# EAGLE board Encoder iC-PX v1b Panel (EAGLE 9.4.2)
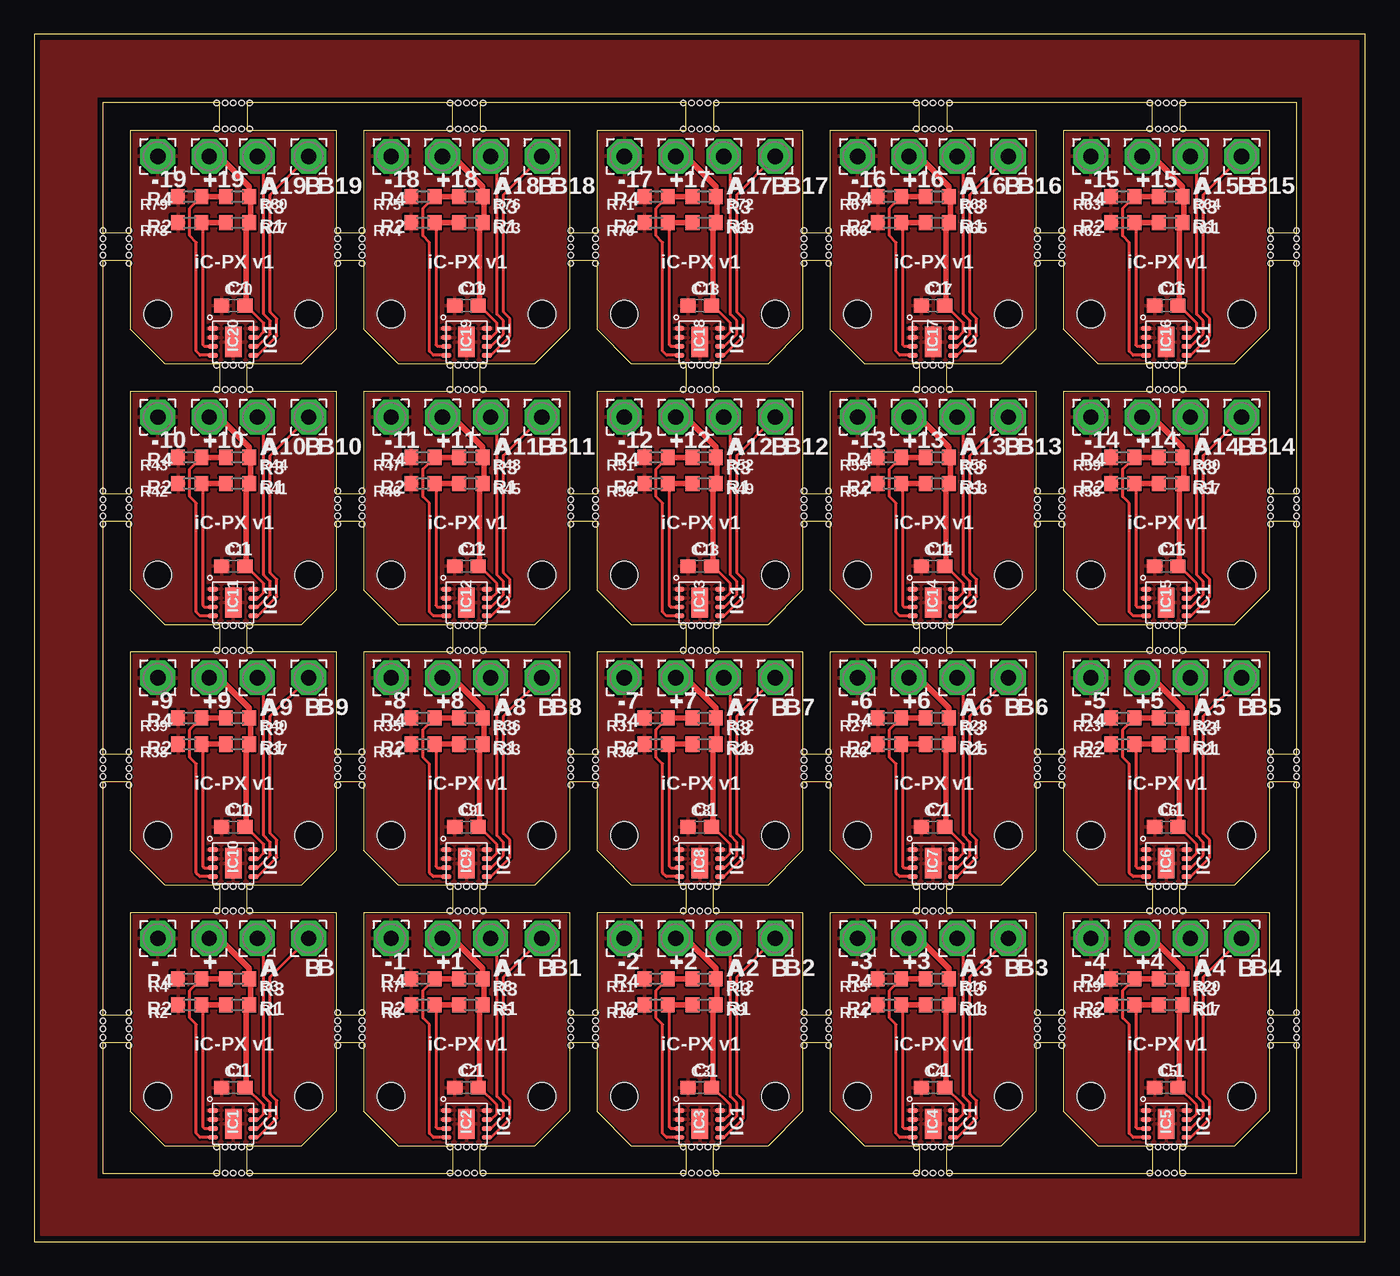
[diagram p0: board, top side]
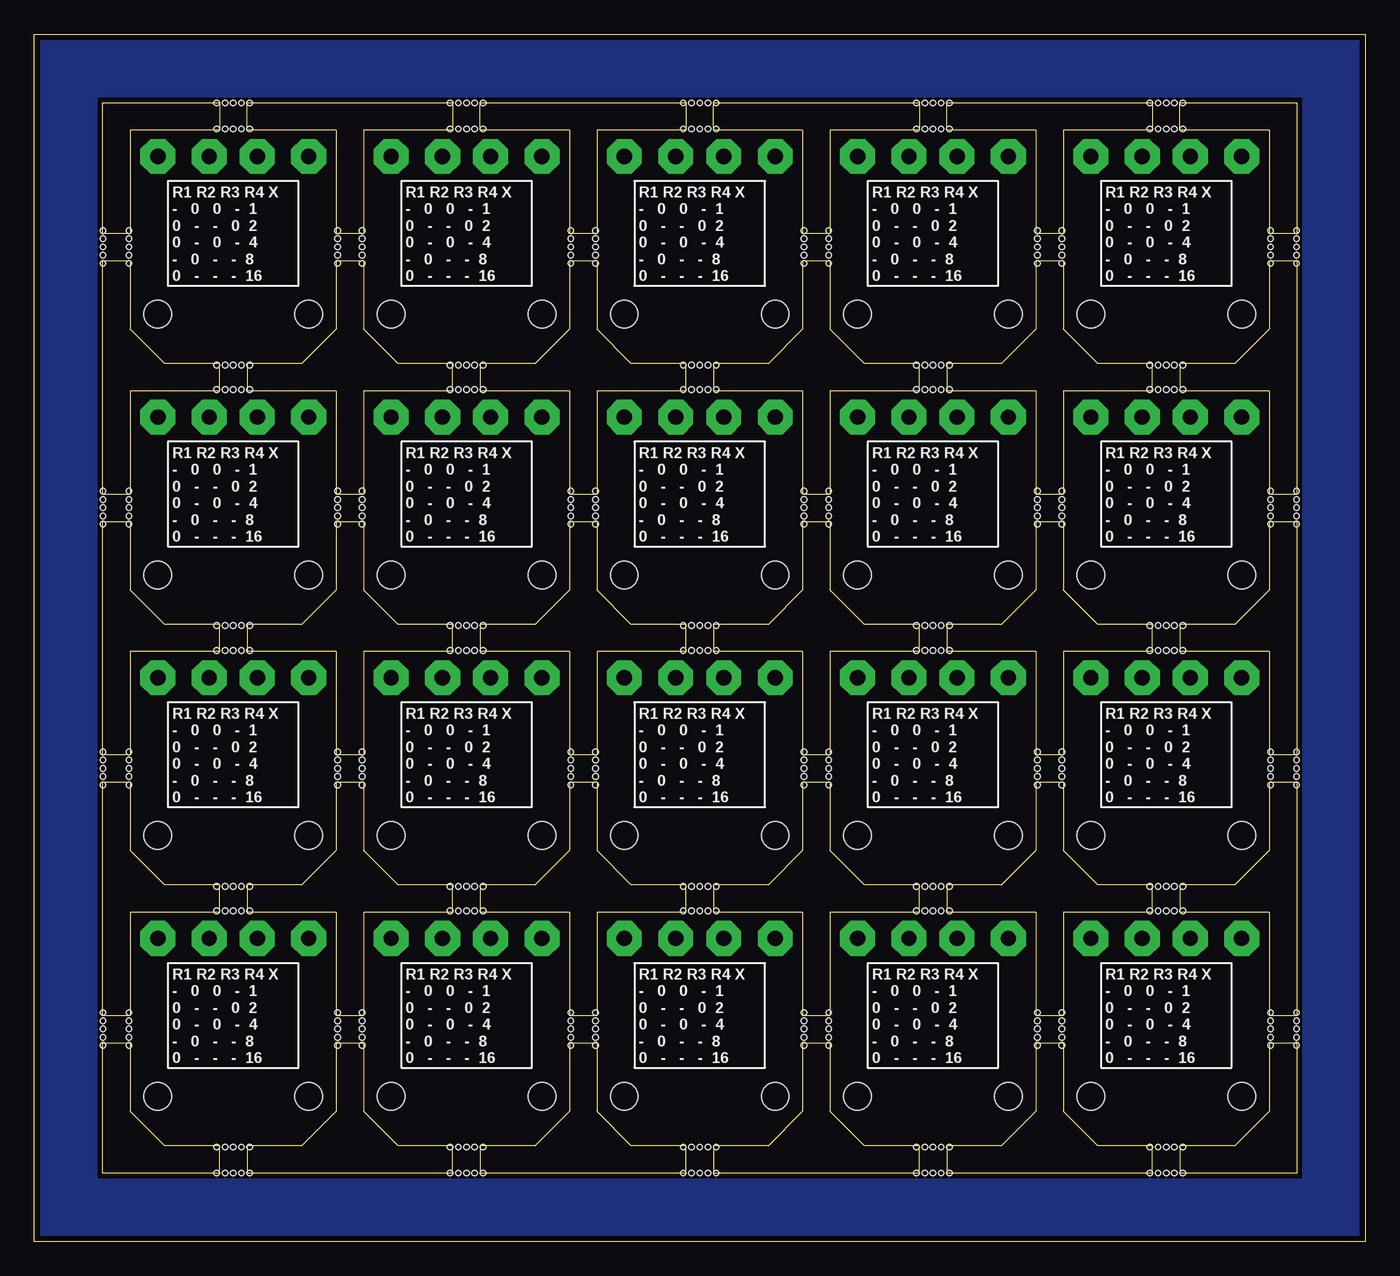
[diagram p1: board, bottom side, seen from below]

Size 97 x 88 mm. Coordinates in mm from the lower left corner, seen from the top.
Outline: 0,0 97,0 97,88 0,88 0,0
Copper layers (1*16): Top 0.035mm / dielectric 1.5mm / Bottom 0.035mm
Design rules "PCB-POOL Standard *": minimum track width 0.15mm, minimum drill 0.3mm, track to track 0.15mm, track to pad 0.15mm, pad to pad 0.15mm, via to via 0.15mm, smd to smd 0.15mm, copper to edge 0.1mm, drill to drill 0.2mm, minimum pad ring 0.2mm, minimum via ring 0.15mm, stop-mask expansion 0.075mm, vias tented up to drill 0mil, thermal gap 0.2mm
Holes 2 mm at 9,10.6 20,10.6 9,29.6 20,29.6 9,48.6 20,48.6 9,67.6 20,67.6 26,10.6 37,10.6 26,29.6 37,29.6 26,48.6 37,48.6 26,67.6 37,67.6 43,10.6 54,10.6 43,29.6 54,29.6 43,48.6 54,48.6 43,67.6 54,67.6 60,10.6 71,10.6 60,29.6 71,29.6 60,48.6 71,48.6 60,67.6 71,67.6 77,10.6 88,10.6 77,29.6 88,29.6 77,48.6 88,48.6 77,67.6 88,67.6
Holes 0.4 mm at 14.5,24.1 15.1,24.1 15.7,24.1 13.9,24.1 13.3,24.1 22.1,15.5 22.1,16.1 22.1,16.7 22.1,14.9 22.1,14.3 6.9,15.5 6.9,16.1 6.9,16.7 6.9,14.9 6.9,14.3 14.5,6.9 15.1,6.9 15.7,6.9 13.9,6.9 13.3,6.9 14.5,43.1 15.1,43.1 15.7,43.1 13.9,43.1 13.3,43.1 22.1,34.5 22.1,35.1 22.1,35.7 22.1,33.9 22.1,33.3 6.9,34.5 6.9,35.1 6.9,35.7 6.9,33.9 6.9,33.3 14.5,25.9 15.1,25.9 15.7,25.9 13.9,25.9 13.3,25.9 14.5,62.1 15.1,62.1 15.7,62.1 13.9,62.1 13.3,62.1 22.1,53.5 22.1,54.1 22.1,54.7 22.1,52.9 22.1,52.3 6.9,53.5 6.9,54.1 6.9,54.7 6.9,52.9 6.9,52.3 14.5,44.9 15.1,44.9 15.7,44.9 13.9,44.9 13.3,44.9 14.5,81.1 15.1,81.1 15.7,81.1 13.9,81.1 13.3,81.1 22.1,72.5 22.1,73.1 22.1,73.7 22.1,71.9 22.1,71.3 6.9,72.5 6.9,73.1 6.9,73.7 6.9,71.9 6.9,71.3 14.5,63.9 15.1,63.9 15.7,63.9 13.9,63.9 13.3,63.9 31.5,24.1 32.1,24.1 32.7,24.1 30.9,24.1 30.3,24.1 39.1,15.5 39.1,16.1 39.1,16.7 39.1,14.9 39.1,14.3 23.9,15.5 23.9,16.1 23.9,16.7 23.9,14.9 23.9,14.3 31.5,6.9 32.1,6.9 32.7,6.9 30.9,6.9 30.3,6.9 31.5,43.1 32.1,43.1 32.7,43.1 30.9,43.1 30.3,43.1 39.1,34.5 39.1,35.1 39.1,35.7 39.1,33.9 39.1,33.3 23.9,34.5 23.9,35.1 23.9,35.7 23.9,33.9 23.9,33.3 31.5,25.9 32.1,25.9 32.7,25.9 30.9,25.9 30.3,25.9 31.5,62.1 32.1,62.1 32.7,62.1 30.9,62.1 30.3,62.1 39.1,53.5 39.1,54.1 39.1,54.7 39.1,52.9 39.1,52.3 23.9,53.5 23.9,54.1 23.9,54.7 23.9,52.9 23.9,52.3 31.5,44.9 32.1,44.9 32.7,44.9 30.9,44.9 30.3,44.9 31.5,81.1 32.1,81.1 32.7,81.1 30.9,81.1 30.3,81.1 39.1,72.5 39.1,73.1 39.1,73.7 39.1,71.9 39.1,71.3 23.9,72.5 23.9,73.1 23.9,73.7 23.9,71.9 23.9,71.3 31.5,63.9 32.1,63.9 32.7,63.9 30.9,63.9 30.3,63.9 48.5,24.1 49.1,24.1 49.7,24.1 47.9,24.1 47.3,24.1 56.1,15.5 56.1,16.1 56.1,16.7 56.1,14.9 56.1,14.3 40.9,15.5 40.9,16.1 40.9,16.7 40.9,14.9 40.9,14.3 48.5,6.9 49.1,6.9 49.7,6.9 47.9,6.9 47.3,6.9 48.5,43.1 49.1,43.1 49.7,43.1 47.9,43.1 47.3,43.1 56.1,34.5 56.1,35.1 56.1,35.7 56.1,33.9 56.1,33.3 40.9,34.5 40.9,35.1 40.9,35.7 40.9,33.9 40.9,33.3 48.5,25.9 49.1,25.9 49.7,25.9 47.9,25.9 47.3,25.9 48.5,62.1 49.1,62.1 49.7,62.1 47.9,62.1 47.3,62.1 56.1,53.5 56.1,54.1 56.1,54.7 56.1,52.9 56.1,52.3 40.9,53.5 40.9,54.1 40.9,54.7 40.9,52.9 40.9,52.3 48.5,44.9 49.1,44.9 49.7,44.9 47.9,44.9 47.3,44.9 48.5,81.1 49.1,81.1 49.7,81.1 47.9,81.1 47.3,81.1 56.1,72.5 56.1,73.1 56.1,73.7 56.1,71.9 56.1,71.3 40.9,72.5 40.9,73.1 40.9,73.7 40.9,71.9 40.9,71.3 48.5,63.9 49.1,63.9 49.7,63.9 47.9,63.9 47.3,63.9 65.5,24.1 66.1,24.1 66.7,24.1 64.9,24.1 64.3,24.1 73.1,15.5 73.1,16.1 73.1,16.7 73.1,14.9 73.1,14.3 57.9,15.5 57.9,16.1 57.9,16.7 57.9,14.9 57.9,14.3 65.5,6.9 66.1,6.9 66.7,6.9 64.9,6.9 64.3,6.9 65.5,43.1 66.1,43.1 66.7,43.1 64.9,43.1 64.3,43.1 73.1,34.5 73.1,35.1 73.1,35.7 73.1,33.9 73.1,33.3 57.9,34.5 57.9,35.1 57.9,35.7 57.9,33.9 57.9,33.3 65.5,25.9 66.1,25.9 66.7,25.9 64.9,25.9 64.3,25.9 65.5,62.1 66.1,62.1 66.7,62.1 64.9,62.1 64.3,62.1 73.1,53.5 73.1,54.1 73.1,54.7 73.1,52.9 73.1,52.3 57.9,53.5 57.9,54.1 57.9,54.7 57.9,52.9 57.9,52.3 65.5,44.9 66.1,44.9 66.7,44.9 64.9,44.9 64.3,44.9 65.5,81.1 66.1,81.1 66.7,81.1 64.9,81.1 64.3,81.1 73.1,72.5 73.1,73.1 73.1,73.7 73.1,71.9 73.1,71.3 57.9,72.5 57.9,73.1 57.9,73.7 57.9,71.9 57.9,71.3 65.5,63.9 66.1,63.9 66.7,63.9 64.9,63.9 64.3,63.9 82.5,24.1 83.1,24.1 83.7,24.1 81.9,24.1 81.3,24.1 90.1,15.5 90.1,16.1 90.1,16.7 90.1,14.9 90.1,14.3 74.9,15.5 74.9,16.1 74.9,16.7 74.9,14.9 74.9,14.3 82.5,6.9 83.1,6.9 83.7,6.9 81.9,6.9 81.3,6.9 82.5,43.1 83.1,43.1 83.7,43.1 81.9,43.1 81.3,43.1 90.1,34.5 90.1,35.1 90.1,35.7 90.1,33.9 90.1,33.3 74.9,34.5 74.9,35.1 74.9,35.7 74.9,33.9 74.9,33.3 82.5,25.9 83.1,25.9 83.7,25.9 81.9,25.9 81.3,25.9 82.5,62.1 83.1,62.1 83.7,62.1 81.9,62.1 81.3,62.1 90.1,53.5 90.1,54.1 90.1,54.7 90.1,52.9 90.1,52.3 74.9,53.5 74.9,54.1 74.9,54.7 74.9,52.9 74.9,52.3 82.5,44.9 83.1,44.9 83.7,44.9 81.9,44.9 81.3,44.9 82.5,81.1 83.1,81.1 83.7,81.1 81.9,81.1 81.3,81.1 90.1,72.5 90.1,73.1 90.1,73.7 90.1,71.9 90.1,71.3 74.9,72.5 74.9,73.1 74.9,73.7 74.9,71.9 74.9,71.3 82.5,63.9 83.1,63.9 83.7,63.9 81.9,63.9 81.3,63.9 5,15.5 5,16.1 5,16.7 5,14.9 5,14.3 5,34.5 5,35.1 5,35.7 5,33.9 5,33.3 5,53.5 5,54.1 5,54.7 5,52.9 5,52.3 5,72.5 5,73.1 5,73.7 5,71.9 5,71.3 14.5,5 15.1,5 15.7,5 13.9,5 13.3,5 31.5,5 32.1,5 32.7,5 30.9,5 30.3,5 48.5,5 49.1,5 49.7,5 47.9,5 47.3,5 65.5,5 66.1,5 66.7,5 64.9,5 64.3,5 82.5,5 83.1,5 83.7,5 81.9,5 81.3,5 92,15.5 92,16.1 92,16.7 92,14.9 92,14.3 92,34.5 92,35.1 92,35.7 92,33.9 92,33.3 92,53.5 92,54.1 92,54.7 92,52.9 92,52.3 92,72.5 92,73.1 92,73.7 92,71.9 92,71.3 14.5,83 15.1,83 15.7,83 13.9,83 13.3,83 31.5,83 32.1,83 32.7,83 30.9,83 30.3,83 48.5,83 49.1,83 49.7,83 47.9,83 47.3,83 65.5,83 66.1,83 66.7,83 64.9,83 64.3,83 82.5,83 83.1,83 83.7,83 81.9,83 81.3,83
tKeepout: area 7,8.6 to 11,12.6; area 18,8.6 to 22,12.6; area 7,27.6 to 11,31.6; area 18,27.6 to 22,31.6; area 7,46.6 to 11,50.6; area 18,46.6 to 22,50.6; area 7,65.6 to 11,69.6; area 18,65.6 to 22,69.6; area 24,8.6 to 28,12.6; area 35,8.6 to 39,12.6; area 24,27.6 to 28,31.6; area 35,27.6 to 39,31.6; 28 more areas
Milling: 320 lines

## Footprints (pad centres in the part's own frame; a part is rotated, then mirrored left to right if it is on the bottom)
2,54/1,1 = drill 1.118 pad 2.54 octagon: 1 0,0
C0603 = smd 1.1 x 1: 1 -0.85,0; 2 0.85,0
ODFN8-3X3 = smd 0.7 x 0.35: 1 -1.475,0.975; 2 -1.475,0.325; 3 -1.475,-0.325; 4 -1.475,-0.975; 5 1.475,-0.975; 6 1.475,-0.325; 7 1.475,0.325; 8 1.475,0.975 | smd 1.2 x 2.2: BP 0,0
R0603 = smd 1 x 1.1: 1 -0.85,0; 2 0.85,0

## Placement (x,y rotation side)
+  WIREPAD2,54/1,1  [2,54/1,1]  12.75,22.1 0 top
+1  WIREPAD2,54/1,1  [2,54/1,1]  29.75,22.1 0 top
+2  WIREPAD2,54/1,1  [2,54/1,1]  46.75,22.1 0 top
+3  WIREPAD2,54/1,1  [2,54/1,1]  63.75,22.1 0 top
+4  WIREPAD2,54/1,1  [2,54/1,1]  80.75,22.1 0 top
+5  WIREPAD2,54/1,1  [2,54/1,1]  80.75,41.1 0 top
+6  WIREPAD2,54/1,1  [2,54/1,1]  63.75,41.1 0 top
+7  WIREPAD2,54/1,1  [2,54/1,1]  46.75,41.1 0 top
+8  WIREPAD2,54/1,1  [2,54/1,1]  29.75,41.1 0 top
+9  WIREPAD2,54/1,1  [2,54/1,1]  12.75,41.1 0 top
+10  WIREPAD2,54/1,1  [2,54/1,1]  12.75,60.1 0 top
+11  WIREPAD2,54/1,1  [2,54/1,1]  29.75,60.1 0 top
+12  WIREPAD2,54/1,1  [2,54/1,1]  46.75,60.1 0 top
+13  WIREPAD2,54/1,1  [2,54/1,1]  63.75,60.1 0 top
+14  WIREPAD2,54/1,1  [2,54/1,1]  80.75,60.1 0 top
+15  WIREPAD2,54/1,1  [2,54/1,1]  80.75,79.1 0 top
+16  WIREPAD2,54/1,1  [2,54/1,1]  63.75,79.1 0 top
+17  WIREPAD2,54/1,1  [2,54/1,1]  46.75,79.1 0 top
+18  WIREPAD2,54/1,1  [2,54/1,1]  29.75,79.1 0 top
+19  WIREPAD2,54/1,1  [2,54/1,1]  12.75,79.1 0 top
-  WIREPAD2,54/1,1  [2,54/1,1]  9,22.1 0 top
-1  WIREPAD2,54/1,1  [2,54/1,1]  26,22.1 0 top
-2  WIREPAD2,54/1,1  [2,54/1,1]  43,22.1 0 top
-3  WIREPAD2,54/1,1  [2,54/1,1]  60,22.1 0 top
-4  WIREPAD2,54/1,1  [2,54/1,1]  77,22.1 0 top
-5  WIREPAD2,54/1,1  [2,54/1,1]  77,41.1 0 top
-6  WIREPAD2,54/1,1  [2,54/1,1]  60,41.1 0 top
-7  WIREPAD2,54/1,1  [2,54/1,1]  43,41.1 0 top
-8  WIREPAD2,54/1,1  [2,54/1,1]  26,41.1 0 top
-9  WIREPAD2,54/1,1  [2,54/1,1]  9,41.1 0 top
-10  WIREPAD2,54/1,1  [2,54/1,1]  9,60.1 0 top
-11  WIREPAD2,54/1,1  [2,54/1,1]  26,60.1 0 top
-12  WIREPAD2,54/1,1  [2,54/1,1]  43,60.1 0 top
-13  WIREPAD2,54/1,1  [2,54/1,1]  60,60.1 0 top
-14  WIREPAD2,54/1,1  [2,54/1,1]  77,60.1 0 top
-15  WIREPAD2,54/1,1  [2,54/1,1]  77,79.1 0 top
-16  WIREPAD2,54/1,1  [2,54/1,1]  60,79.1 0 top
-17  WIREPAD2,54/1,1  [2,54/1,1]  43,79.1 0 top
-18  WIREPAD2,54/1,1  [2,54/1,1]  26,79.1 0 top
-19  WIREPAD2,54/1,1  [2,54/1,1]  9,79.1 0 top
A  WIREPAD2,54/1,1  [2,54/1,1]  16.25,22.1 0 top
A1  WIREPAD2,54/1,1  [2,54/1,1]  33.25,22.1 0 top
A2  WIREPAD2,54/1,1  [2,54/1,1]  50.25,22.1 0 top
A3  WIREPAD2,54/1,1  [2,54/1,1]  67.25,22.1 0 top
A4  WIREPAD2,54/1,1  [2,54/1,1]  84.25,22.1 0 top
A5  WIREPAD2,54/1,1  [2,54/1,1]  84.25,41.1 0 top
A6  WIREPAD2,54/1,1  [2,54/1,1]  67.25,41.1 0 top
A7  WIREPAD2,54/1,1  [2,54/1,1]  50.25,41.1 0 top
A8  WIREPAD2,54/1,1  [2,54/1,1]  33.25,41.1 0 top
A9  WIREPAD2,54/1,1  [2,54/1,1]  16.25,41.1 0 top
A10  WIREPAD2,54/1,1  [2,54/1,1]  16.25,60.1 0 top
A11  WIREPAD2,54/1,1  [2,54/1,1]  33.25,60.1 0 top
A12  WIREPAD2,54/1,1  [2,54/1,1]  50.25,60.1 0 top
A13  WIREPAD2,54/1,1  [2,54/1,1]  67.25,60.1 0 top
A14  WIREPAD2,54/1,1  [2,54/1,1]  84.25,60.1 0 top
A15  WIREPAD2,54/1,1  [2,54/1,1]  84.25,79.1 0 top
A16  WIREPAD2,54/1,1  [2,54/1,1]  67.25,79.1 0 top
A17  WIREPAD2,54/1,1  [2,54/1,1]  50.25,79.1 0 top
A18  WIREPAD2,54/1,1  [2,54/1,1]  33.25,79.1 0 top
A19  WIREPAD2,54/1,1  [2,54/1,1]  16.25,79.1 0 top
B  WIREPAD2,54/1,1  [2,54/1,1]  20,22.1 0 top
B1  WIREPAD2,54/1,1  [2,54/1,1]  37,22.1 0 top
B2  WIREPAD2,54/1,1  [2,54/1,1]  54,22.1 0 top
B3  WIREPAD2,54/1,1  [2,54/1,1]  71,22.1 0 top
B4  WIREPAD2,54/1,1  [2,54/1,1]  88,22.1 0 top
B5  WIREPAD2,54/1,1  [2,54/1,1]  88,41.1 0 top
B6  WIREPAD2,54/1,1  [2,54/1,1]  71,41.1 0 top
B7  WIREPAD2,54/1,1  [2,54/1,1]  54,41.1 0 top
B8  WIREPAD2,54/1,1  [2,54/1,1]  37,41.1 0 top
B9  WIREPAD2,54/1,1  [2,54/1,1]  20,41.1 0 top
B10  WIREPAD2,54/1,1  [2,54/1,1]  20,60.1 0 top
B11  WIREPAD2,54/1,1  [2,54/1,1]  37,60.1 0 top
B12  WIREPAD2,54/1,1  [2,54/1,1]  54,60.1 0 top
B13  WIREPAD2,54/1,1  [2,54/1,1]  71,60.1 0 top
B14  WIREPAD2,54/1,1  [2,54/1,1]  88,60.1 0 top
B15  WIREPAD2,54/1,1  [2,54/1,1]  88,79.1 0 top
B16  WIREPAD2,54/1,1  [2,54/1,1]  71,79.1 0 top
B17  WIREPAD2,54/1,1  [2,54/1,1]  54,79.1 0 top
B18  WIREPAD2,54/1,1  [2,54/1,1]  37,79.1 0 top
B19  WIREPAD2,54/1,1  [2,54/1,1]  20,79.1 0 top
C1  100n  [C0603]  14.5,11.23 180 top
C2  100n  [C0603]  31.5,11.23 180 top
C3  100n  [C0603]  48.5,11.23 180 top
C4  100n  [C0603]  65.5,11.23 180 top
C5  100n  [C0603]  82.5,11.23 180 top
C6  100n  [C0603]  82.5,30.23 180 top
C7  100n  [C0603]  65.5,30.23 180 top
C8  100n  [C0603]  48.5,30.23 180 top
C9  100n  [C0603]  31.5,30.23 180 top
C10  100n  [C0603]  14.5,30.23 180 top
C11  100n  [C0603]  14.5,49.23 180 top
C12  100n  [C0603]  31.5,49.23 180 top
C13  100n  [C0603]  48.5,49.23 180 top
C14  100n  [C0603]  65.5,49.23 180 top
C15  100n  [C0603]  82.5,49.23 180 top
C16  100n  [C0603]  82.5,68.23 180 top
C17  100n  [C0603]  65.5,68.23 180 top
C18  100n  [C0603]  48.5,68.23 180 top
C19  100n  [C0603]  31.5,68.23 180 top
C20  100n  [C0603]  14.5,68.23 180 top
IC1  iC-PX2604  [ODFN8-3X3]  14.5,8.58 0 top
IC2  iC-PX2604  [ODFN8-3X3]  31.5,8.58 0 top
IC3  iC-PX2604  [ODFN8-3X3]  48.5,8.58 0 top
IC4  iC-PX2604  [ODFN8-3X3]  65.5,8.58 0 top
IC5  iC-PX2604  [ODFN8-3X3]  82.5,8.58 0 top
IC6  iC-PX2604  [ODFN8-3X3]  82.5,27.58 0 top
IC7  iC-PX2604  [ODFN8-3X3]  65.5,27.58 0 top
IC8  iC-PX2604  [ODFN8-3X3]  48.5,27.58 0 top
IC9  iC-PX2604  [ODFN8-3X3]  31.5,27.58 0 top
IC10  iC-PX2604  [ODFN8-3X3]  14.5,27.58 0 top
IC11  iC-PX2604  [ODFN8-3X3]  14.5,46.58 0 top
IC12  iC-PX2604  [ODFN8-3X3]  31.5,46.58 0 top
IC13  iC-PX2604  [ODFN8-3X3]  48.5,46.58 0 top
IC14  iC-PX2604  [ODFN8-3X3]  65.5,46.58 0 top
IC15  iC-PX2604  [ODFN8-3X3]  82.5,46.58 0 top
IC16  iC-PX2604  [ODFN8-3X3]  82.5,65.58 0 top
IC17  iC-PX2604  [ODFN8-3X3]  65.5,65.58 0 top
IC18  iC-PX2604  [ODFN8-3X3]  48.5,65.58 0 top
IC19  iC-PX2604  [ODFN8-3X3]  31.5,65.58 0 top
IC20  iC-PX2604  [ODFN8-3X3]  14.5,65.58 0 top
R1  0R  [R0603]  14.82,17.26 0 top
R2  N/A  [R0603]  11.32,17.26 0 top
R3  N/A  [R0603]  14.82,19.16 0 top
R4  N/A  [R0603]  11.32,19.16 0 top
R5  0R  [R0603]  31.82,17.26 0 top
R6  N/A  [R0603]  28.32,17.26 0 top
R7  N/A  [R0603]  28.32,19.16 0 top
R8  N/A  [R0603]  31.82,19.16 0 top
R9  0R  [R0603]  48.82,17.26 0 top
R10  N/A  [R0603]  45.33,17.26 0 top
R11  N/A  [R0603]  45.33,19.16 0 top
R12  N/A  [R0603]  48.82,19.16 0 top
R13  0R  [R0603]  65.82,17.26 0 top
R14  N/A  [R0603]  62.33,17.26 0 top
R15  N/A  [R0603]  62.33,19.16 0 top
R16  N/A  [R0603]  65.82,19.16 0 top
R17  0R  [R0603]  82.82,17.26 0 top
R18  N/A  [R0603]  79.33,17.26 0 top
R19  N/A  [R0603]  79.33,19.16 0 top
R20  N/A  [R0603]  82.82,19.16 0 top
R21  0R  [R0603]  82.82,36.26 0 top
R22  N/A  [R0603]  79.33,36.26 0 top
R23  N/A  [R0603]  79.33,38.16 0 top
R24  N/A  [R0603]  82.82,38.16 0 top
R25  0R  [R0603]  65.82,36.26 0 top
R26  N/A  [R0603]  62.33,36.26 0 top
R27  N/A  [R0603]  62.33,38.16 0 top
R28  N/A  [R0603]  65.82,38.16 0 top
R29  0R  [R0603]  48.82,36.26 0 top
R30  N/A  [R0603]  45.33,36.26 0 top
R31  N/A  [R0603]  45.33,38.16 0 top
R32  N/A  [R0603]  48.82,38.16 0 top
R33  0R  [R0603]  31.82,36.26 0 top
R34  N/A  [R0603]  28.32,36.26 0 top
R35  N/A  [R0603]  28.32,38.16 0 top
R36  N/A  [R0603]  31.82,38.16 0 top
R37  0R  [R0603]  14.82,36.26 0 top
R38  N/A  [R0603]  11.32,36.26 0 top
R39  N/A  [R0603]  11.32,38.16 0 top
R40  N/A  [R0603]  14.82,38.16 0 top
R41  0R  [R0603]  14.82,55.26 0 top
R42  N/A  [R0603]  11.32,55.26 0 top
R43  N/A  [R0603]  11.32,57.16 0 top
R44  N/A  [R0603]  14.82,57.16 0 top
R45  0R  [R0603]  31.82,55.26 0 top
R46  N/A  [R0603]  28.32,55.26 0 top
R47  N/A  [R0603]  28.32,57.16 0 top
R48  N/A  [R0603]  31.82,57.16 0 top
R49  0R  [R0603]  48.82,55.26 0 top
R50  N/A  [R0603]  45.33,55.26 0 top
R51  N/A  [R0603]  45.33,57.16 0 top
R52  N/A  [R0603]  48.82,57.16 0 top
R53  0R  [R0603]  65.82,55.26 0 top
R54  N/A  [R0603]  62.33,55.26 0 top
R55  N/A  [R0603]  62.33,57.16 0 top
R56  N/A  [R0603]  65.82,57.16 0 top
R57  0R  [R0603]  82.82,55.26 0 top
R58  N/A  [R0603]  79.33,55.26 0 top
R59  N/A  [R0603]  79.33,57.16 0 top
R60  N/A  [R0603]  82.82,57.16 0 top
R61  0R  [R0603]  82.82,74.26 0 top
R62  N/A  [R0603]  79.33,74.26 0 top
R63  N/A  [R0603]  79.33,76.17 0 top
R64  N/A  [R0603]  82.82,76.17 0 top
R65  0R  [R0603]  65.82,74.26 0 top
R66  N/A  [R0603]  62.33,74.26 0 top
R67  N/A  [R0603]  62.33,76.17 0 top
R68  N/A  [R0603]  65.82,76.17 0 top
R69  0R  [R0603]  48.82,74.26 0 top
R70  N/A  [R0603]  45.33,74.26 0 top
R71  N/A  [R0603]  45.33,76.17 0 top
R72  N/A  [R0603]  48.82,76.17 0 top
R73  0R  [R0603]  31.82,74.26 0 top
R74  N/A  [R0603]  28.32,74.26 0 top
R75  N/A  [R0603]  28.32,76.17 0 top
R76  N/A  [R0603]  31.82,76.17 0 top
R77  0R  [R0603]  14.82,74.26 0 top
R78  N/A  [R0603]  11.32,74.26 0 top
R79  N/A  [R0603]  11.32,76.17 0 top
R80  N/A  [R0603]  14.82,76.17 0 top

## Library data of the parts
+ +1-+19 - -1--19 A A1-A19 B B1-B19 = wirepad
C1-C20 = rcl; SPICEPREFIX: C
IC1-IC20 = TIGERs
R1-R80 = rcl; SPICEPREFIX: R

## Nets
+5V: +.1 C1.1 IC1.7 R1.2 R3.2
+5V1: +1.1 C2.1 IC2.7 R5.2 R8.2
+5V2: +2.1 C3.1 IC3.7 R9.2 R12.2
+5V3: +3.1 C4.1 IC4.7 R13.2 R16.2
+5V4: +4.1 C5.1 IC5.7 R17.2 R20.2
+5V5: +5.1 C6.1 IC6.7 R21.2 R24.2
+5V6: +6.1 C7.1 IC7.7 R25.2 R28.2
+5V7: +7.1 C8.1 IC8.7 R29.2 R32.2
+5V8: +8.1 C9.1 IC9.7 R33.2 R36.2
+5V9: +9.1 C10.1 IC10.7 R37.2 R40.2
+5V10: +10.1 C11.1 IC11.7 R41.2 R44.2
+5V11: +11.1 C12.1 IC12.7 R45.2 R48.2
+5V12: +12.1 C13.1 IC13.7 R49.2 R52.2
+5V13: +13.1 C14.1 IC14.7 R53.2 R56.2
+5V14: +14.1 C15.1 IC15.7 R57.2 R60.2
+5V15: +15.1 C16.1 IC16.7 R61.2 R64.2
+5V16: +16.1 C17.1 IC17.7 R65.2 R68.2
+5V17: +17.1 C18.1 IC18.7 R69.2 R72.2
+5V18: +18.1 C19.1 IC19.7 R73.2 R76.2
+5V19: +19.1 C20.1 IC20.7 R77.2 R80.2
CH-A: A.1 IC1.6
CH-A1: A1.1 IC2.6
CH-A2: A2.1 IC3.6
CH-A3: A3.1 IC4.6
CH-A4: A4.1 IC5.6
CH-A5: A5.1 IC6.6
CH-A6: A6.1 IC7.6
CH-A7: A7.1 IC8.6
CH-A8: A8.1 IC9.6
CH-A9: A9.1 IC10.6
CH-A10: A10.1 IC11.6
CH-A11: A11.1 IC12.6
CH-A12: A12.1 IC13.6
CH-A13: A13.1 IC14.6
CH-A14: A14.1 IC15.6
CH-A15: A15.1 IC16.6
CH-A16: A16.1 IC17.6
CH-A17: A17.1 IC18.6
CH-A18: A18.1 IC19.6
CH-A19: A19.1 IC20.6
CH-B: B.1 IC1.5
CH-B1: B1.1 IC2.5
CH-B2: B2.1 IC3.5
CH-B3: B3.1 IC4.5
CH-B4: B4.1 IC5.5
CH-B5: B5.1 IC6.5
CH-B6: B6.1 IC7.5
CH-B7: B7.1 IC8.5
CH-B8: B8.1 IC9.5
CH-B9: B9.1 IC10.5
CH-B10: B10.1 IC11.5
CH-B11: B11.1 IC12.5
CH-B12: B12.1 IC13.5
CH-B13: B13.1 IC14.5
CH-B14: B14.1 IC15.5
CH-B15: B15.1 IC16.5
CH-B16: B16.1 IC17.5
CH-B17: B17.1 IC18.5
CH-B18: B18.1 IC19.5
CH-B19: B19.1 IC20.5
GND: -.1 C1.2 IC1.1 IC1.2 IC1.8 IC1.BP R2.1 R4.1
GND1: -1.1 C2.2 IC2.1 IC2.2 IC2.8 IC2.BP R6.1 R7.1
GND2: -2.1 C3.2 IC3.1 IC3.2 IC3.8 IC3.BP R10.1 R11.1
GND3: -3.1 C4.2 IC4.1 IC4.2 IC4.8 IC4.BP R14.1 R15.1
GND4: -4.1 C5.2 IC5.1 IC5.2 IC5.8 IC5.BP R18.1 R19.1
GND5: -5.1 C6.2 IC6.1 IC6.2 IC6.8 IC6.BP R22.1 R23.1
GND6: -6.1 C7.2 IC7.1 IC7.2 IC7.8 IC7.BP R26.1 R27.1
GND7: -7.1 C8.2 IC8.1 IC8.2 IC8.8 IC8.BP R30.1 R31.1
GND8: -8.1 C9.2 IC9.1 IC9.2 IC9.8 IC9.BP R34.1 R35.1
GND9: -9.1 C10.2 IC10.1 IC10.2 IC10.8 IC10.BP R38.1 R39.1
GND10: -10.1 C11.2 IC11.1 IC11.2 IC11.8 IC11.BP R42.1 R43.1
GND11: -11.1 C12.2 IC12.1 IC12.2 IC12.8 IC12.BP R46.1 R47.1
GND12: -12.1 C13.2 IC13.1 IC13.2 IC13.8 IC13.BP R50.1 R51.1
GND13: -13.1 C14.2 IC14.1 IC14.2 IC14.8 IC14.BP R54.1 R55.1
GND14: -14.1 C15.2 IC15.1 IC15.2 IC15.8 IC15.BP R58.1 R59.1
GND15: -15.1 C16.2 IC16.1 IC16.2 IC16.8 IC16.BP R62.1 R63.1
GND16: -16.1 C17.2 IC17.1 IC17.2 IC17.8 IC17.BP R66.1 R67.1
GND17: -17.1 C18.2 IC18.1 IC18.2 IC18.8 IC18.BP R70.1 R71.1
GND18: -18.1 C19.2 IC19.1 IC19.2 IC19.8 IC19.BP R74.1 R75.1
GND19: -19.1 C20.2 IC20.1 IC20.2 IC20.8 IC20.BP R78.1 R79.1
SEL1: IC1.3 R1.1 R2.2
SEL2: IC1.4 R3.1 R4.2
SEL3: IC2.3 R5.1 R6.2
SEL4: IC2.4 R7.2 R8.1
SEL5: IC3.3 R9.1 R10.2
SEL6: IC3.4 R11.2 R12.1
SEL7: IC4.3 R13.1 R14.2
SEL8: IC4.4 R15.2 R16.1
SEL9: IC5.3 R17.1 R18.2
SEL10: IC5.4 R19.2 R20.1
SEL11: IC6.3 R21.1 R22.2
SEL12: IC6.4 R23.2 R24.1
SEL13: IC7.3 R25.1 R26.2
SEL14: IC7.4 R27.2 R28.1
SEL15: IC8.3 R29.1 R30.2
SEL16: IC8.4 R31.2 R32.1
SEL17: IC9.3 R33.1 R34.2
SEL18: IC9.4 R35.2 R36.1
SEL19: IC10.3 R37.1 R38.2
SEL20: IC10.4 R39.2 R40.1
SEL21: IC11.3 R41.1 R42.2
SEL22: IC11.4 R43.2 R44.1
SEL23: IC12.3 R45.1 R46.2
SEL24: IC12.4 R47.2 R48.1
SEL25: IC13.3 R49.1 R50.2
SEL26: IC13.4 R51.2 R52.1
SEL27: IC14.3 R53.1 R54.2
SEL28: IC14.4 R55.2 R56.1
SEL29: IC15.3 R57.1 R58.2
SEL30: IC15.4 R59.2 R60.1
SEL31: IC16.3 R61.1 R62.2
SEL32: IC16.4 R63.2 R64.1
SEL33: IC17.3 R65.1 R66.2
SEL34: IC17.4 R67.2 R68.1
SEL35: IC18.3 R69.1 R70.2
SEL36: IC18.4 R71.2 R72.1
SEL37: IC19.3 R73.1 R74.2
SEL38: IC19.4 R75.2 R76.1
SEL39: IC20.3 R77.1 R78.2
SEL40: IC20.4 R79.2 R80.1

## Tracks (layer width: path | path; a pad name or v marks a point on that pad's centre or on a via)
+5V
  Top 0.203: IC1.7 16.31,8.91 16.72,9.32 16.72,9.96 15.45,11.23 C1.1
  Top 0.406: C1.1 15.45,11.33 15.45,17.05 R1.2 15.77,17.36 15.77,19.06 R3.2 15.67,19.9 13.47,22.1 +.1
+5V1
  Top 0.203: IC2.7 33.31,8.91 33.72,9.32 33.72,9.96 32.45,11.23 C2.1
  Top 0.406: C2.1 32.45,11.33 32.45,17.05 R5.2 32.77,17.36 32.77,19.06 R8.2 32.67,19.9 30.47,22.1 +1.1
+5V2
  Top 0.203: IC3.7 50.31,8.91 50.72,9.32 50.72,9.96 49.45,11.23 C3.1
  Top 0.406: C3.1 49.45,11.33 49.45,17.05 R9.2 49.77,17.36 49.77,19.06 R12.2 49.67,19.9 47.47,22.1 +2.1
+5V3
  Top 0.203: IC4.7 67.31,8.91 67.72,9.32 67.72,9.96 66.45,11.23 C4.1
  Top 0.406: C4.1 66.45,11.33 66.45,17.05 R13.2 66.77,17.36 66.77,19.06 R16.2 66.67,19.9 64.47,22.1 +3.1
+5V4
  Top 0.203: IC5.7 84.31,8.91 84.72,9.32 84.72,9.96 83.45,11.23 C5.1
  Top 0.406: C5.1 83.45,11.33 83.45,17.05 R17.2 83.77,17.36 83.77,19.06 R20.2 83.67,19.9 81.47,22.1 +4.1
+5V5
  Top 0.203: IC6.7 84.31,27.91 84.72,28.32 84.72,28.96 83.45,30.23 C6.1
  Top 0.406: C6.1 83.45,30.33 83.45,36.05 R21.2 83.77,36.36 83.77,38.06 R24.2 83.67,38.9 81.47,41.1 +5.1
+5V6
  Top 0.203: IC7.7 67.31,27.91 67.72,28.32 67.72,28.96 66.45,30.23 C7.1
  Top 0.406: C7.1 66.45,30.33 66.45,36.05 R25.2 66.77,36.36 66.77,38.06 R28.2 66.67,38.9 64.47,41.1 +6.1
+5V7
  Top 0.203: IC8.7 50.31,27.91 50.72,28.32 50.72,28.96 49.45,30.23 C8.1
  Top 0.406: C8.1 49.45,30.33 49.45,36.05 R29.2 49.77,36.36 49.77,38.06 R32.2 49.67,38.9 47.47,41.1 +7.1
+5V8
  Top 0.203: IC9.7 33.31,27.91 33.72,28.32 33.72,28.96 32.45,30.23 C9.1
  Top 0.406: C9.1 32.45,30.33 32.45,36.05 R33.2 32.77,36.36 32.77,38.06 R36.2 32.67,38.9 30.47,41.1 +8.1
+5V9
  Top 0.203: IC10.7 16.31,27.91 16.72,28.32 16.72,28.96 15.45,30.23 C10.1
  Top 0.406: C10.1 15.45,30.33 15.45,36.05 R37.2 15.77,36.36 15.77,38.06 R40.2 15.67,38.9 13.47,41.1 +9.1
+5V10
  Top 0.203: IC11.7 16.31,46.91 16.72,47.32 16.72,47.96 15.45,49.23 C11.1
  Top 0.406: C11.1 15.45,49.33 15.45,55.05 R41.2 15.77,55.36 15.77,57.06 R44.2 15.67,57.9 13.47,60.1 +10.1
+5V11
  Top 0.203: IC12.7 33.31,46.91 33.72,47.32 33.72,47.96 32.45,49.23 C12.1
  Top 0.406: C12.1 32.45,49.33 32.45,55.05 R45.2 32.77,55.36 32.77,57.06 R48.2 32.67,57.9 30.47,60.1 +11.1
+5V12
  Top 0.203: IC13.7 50.31,46.91 50.72,47.32 50.72,47.96 49.45,49.23 C13.1
  Top 0.406: C13.1 49.45,49.33 49.45,55.05 R49.2 49.77,55.36 49.77,57.06 R52.2 49.67,57.9 47.47,60.1 +12.1
+5V13
  Top 0.203: IC14.7 67.31,46.91 67.72,47.32 67.72,47.96 66.45,49.23 C14.1
  Top 0.406: C14.1 66.45,49.33 66.45,55.05 R53.2 66.77,55.36 66.77,57.06 R56.2 66.67,57.9 64.47,60.1 +13.1
+5V14
  Top 0.203: IC15.7 84.31,46.91 84.72,47.32 84.72,47.96 83.45,49.23 C15.1
  Top 0.406: C15.1 83.45,49.33 83.45,55.05 R57.2 83.77,55.36 83.77,57.06 R60.2 83.67,57.9 81.47,60.1 +14.1
+5V15
  Top 0.203: IC16.7 84.31,65.91 84.72,66.32 84.72,66.96 83.45,68.23 C16.1
  Top 0.406: C16.1 83.45,68.33 83.45,74.05 R61.2 83.77,74.36 83.77,76.06 R64.2 83.67,76.9 81.47,79.1 +15.1
+5V16
  Top 0.203: IC17.7 67.31,65.91 67.72,66.32 67.72,66.96 66.45,68.23 C17.1
  Top 0.406: C17.1 66.45,68.33 66.45,74.05 R65.2 66.77,74.36 66.77,76.06 R68.2 66.67,76.9 64.47,79.1 +16.1
+5V17
  Top 0.203: IC18.7 50.31,65.91 50.72,66.32 50.72,66.96 49.45,68.23 C18.1
  Top 0.406: C18.1 49.45,68.33 49.45,74.05 R69.2 49.77,74.36 49.77,76.06 R72.2 49.67,76.9 47.47,79.1 +17.1
+5V18
  Top 0.203: IC19.7 33.31,65.91 33.72,66.32 33.72,66.96 32.45,68.23 C19.1
  Top 0.406: C19.1 32.45,68.33 32.45,74.05 R73.2 32.77,74.36 32.77,76.06 R76.2 32.67,76.9 30.47,79.1 +18.1
+5V19
  Top 0.203: IC20.7 16.31,65.91 16.72,66.32 16.72,66.96 15.45,68.23 C20.1
  Top 0.406: C20.1 15.45,68.33 15.45,74.05 R77.2 15.77,74.36 15.77,76.06 R80.2 15.67,76.9 13.47,79.1 +19.1
CH-A
  Top 0.203: A.1 16.72,21.63 16.72,10.59 17.2,10.12 17.2,9.16 16.29,8.26 IC1.6
CH-A1
  Top 0.203: A1.1 33.72,21.63 33.72,10.59 34.2,10.12 34.2,9.16 33.29,8.26 IC2.6
CH-A2
  Top 0.203: A2.1 50.72,21.63 50.72,10.59 51.2,10.12 51.2,9.16 50.29,8.26 IC3.6
CH-A3
  Top 0.203: A3.1 67.72,21.63 67.72,10.59 68.2,10.12 68.2,9.16 67.29,8.26 IC4.6
CH-A4
  Top 0.203: A4.1 84.72,21.63 84.72,10.59 85.2,10.12 85.2,9.16 84.29,8.26 IC5.6
CH-A5
  Top 0.203: A5.1 84.72,40.63 84.72,29.59 85.2,29.12 85.2,28.16 84.29,27.26 IC6.6
CH-A6
  Top 0.203: A6.1 67.72,40.63 67.72,29.59 68.2,29.12 68.2,28.16 67.29,27.26 IC7.6
CH-A7
  Top 0.203: A7.1 50.72,40.63 50.72,29.59 51.2,29.12 51.2,28.16 50.29,27.26 IC8.6
CH-A8
  Top 0.203: A8.1 33.72,40.63 33.72,29.59 34.2,29.12 34.2,28.16 33.29,27.26 IC9.6
CH-A9
  Top 0.203: A9.1 16.72,40.63 16.72,29.59 17.2,29.12 17.2,28.16 16.29,27.26 IC10.6
CH-A10
  Top 0.203: A10.1 16.72,59.63 16.72,48.59 17.2,48.12 17.2,47.16 16.29,46.26 IC11.6
CH-A11
  Top 0.203: A11.1 33.72,59.63 33.72,48.59 34.2,48.12 34.2,47.16 33.29,46.26 IC12.6
CH-A12
  Top 0.203: A12.1 50.72,59.63 50.72,48.59 51.2,48.12 51.2,47.16 50.29,46.26 IC13.6
CH-A13
  Top 0.203: A13.1 67.72,59.63 67.72,48.59 68.2,48.12 68.2,47.16 67.29,46.26 IC14.6
CH-A14
  Top 0.203: A14.1 84.72,59.63 84.72,48.59 85.2,48.12 85.2,47.16 84.29,46.26 IC15.6
CH-A15
  Top 0.203: A15.1 84.72,78.63 84.72,67.59 85.2,67.12 85.2,66.16 84.29,65.26 IC16.6
CH-A16
  Top 0.203: A16.1 67.72,78.63 67.72,67.59 68.2,67.12 68.2,66.16 67.29,65.26 IC17.6
CH-A17
  Top 0.203: A17.1 50.72,78.63 50.72,67.59 51.2,67.12 51.2,66.16 50.29,65.26 IC18.6
CH-A18
  Top 0.203: A18.1 33.72,78.63 33.72,67.59 34.2,67.12 34.2,66.16 33.29,65.26 IC19.6
CH-A19
  Top 0.203: A19.1 16.72,78.63 16.72,67.59 17.2,67.12 17.2,66.16 16.29,65.26 IC20.6
CH-B
  Top 0.203: B.1 17.2,19.3 17.2,10.75 17.68,10.28 17.68,9.01 16.28,7.61 IC1.5
CH-B1
  Top 0.203: B1.1 34.2,19.3 34.2,10.75 34.67,10.28 34.67,9.01 33.28,7.61 IC2.5
CH-B2
  Top 0.203: B2.1 51.2,19.3 51.2,10.75 51.67,10.28 51.67,9.01 50.28,7.61 IC3.5
CH-B3
  Top 0.203: B3.1 68.2,19.3 68.2,10.75 68.67,10.28 68.67,9.01 67.28,7.61 IC4.5
CH-B4
  Top 0.203: B4.1 85.2,19.3 85.2,10.75 85.67,10.28 85.67,9.01 84.28,7.61 IC5.5
CH-B5
  Top 0.203: B5.1 85.2,38.3 85.2,29.75 85.67,29.27 85.67,28 84.28,26.61 IC6.5
CH-B6
  Top 0.203: B6.1 68.2,38.3 68.2,29.75 68.67,29.27 68.67,28 67.28,26.61 IC7.5
CH-B7
  Top 0.203: B7.1 51.2,38.3 51.2,29.75 51.67,29.27 51.67,28 50.28,26.61 IC8.5
CH-B8
  Top 0.203: B8.1 34.2,38.3 34.2,29.75 34.67,29.27 34.67,28 33.28,26.61 IC9.5
CH-B9
  Top 0.203: B9.1 17.2,38.3 17.2,29.75 17.68,29.27 17.68,28 16.28,26.61 IC10.5
CH-B10
  Top 0.203: B10.1 17.2,57.3 17.2,48.75 17.68,48.27 17.68,47.01 16.28,45.61 IC11.5
CH-B11
  Top 0.203: B11.1 34.2,57.3 34.2,48.75 34.67,48.27 34.67,47.01 33.28,45.61 IC12.5
CH-B12
  Top 0.203: B12.1 51.2,57.3 51.2,48.75 51.67,48.27 51.67,47.01 50.28,45.61 IC13.5
CH-B13
  Top 0.203: B13.1 68.2,57.3 68.2,48.75 68.67,48.27 68.67,47.01 67.28,45.61 IC14.5
CH-B14
  Top 0.203: B14.1 85.2,57.3 85.2,48.75 85.67,48.27 85.67,47.01 84.28,45.61 IC15.5
CH-B15
  Top 0.203: B15.1 85.2,76.3 85.2,67.75 85.67,67.28 85.67,66 84.28,64.61 IC16.5
CH-B16
  Top 0.203: B16.1 68.2,76.3 68.2,67.75 68.67,67.28 68.67,66 67.28,64.61 IC17.5
CH-B17
  Top 0.203: B17.1 51.2,76.3 51.2,67.75 51.67,67.28 51.67,66 50.28,64.61 IC18.5
CH-B18
  Top 0.203: B18.1 34.2,76.3 34.2,67.75 34.67,67.28 34.67,66 33.28,64.61 IC19.5
CH-B19
  Top 0.203: B19.1 17.2,76.3 17.2,67.75 17.68,67.28 17.68,66 16.28,64.61 IC20.5
GND
  pour Top: 7.2,23.8 21.8,23.8 21.8,9.6 19.4,7.2 19.3,7.2 9.6,7.2 9.4,7.4 7.2,9.6
GND1
  pour Top: 24.2,23.8 38.8,23.8 38.8,9.6 36.4,7.2 36.3,7.2 26.6,7.2 26.4,7.4 24.2,9.6
GND2
  pour Top: 41.2,23.8 55.8,23.8 55.8,9.6 53.4,7.2 53.3,7.2 43.6,7.2 43.4,7.4 41.2,9.6
GND3
  pour Top: 58.2,23.8 72.8,23.8 72.8,9.6 70.4,7.2 70.3,7.2 60.6,7.2 60.4,7.4 58.2,9.6
GND4
  pour Top: 75.2,23.8 89.8,23.8 89.8,9.6 87.4,7.2 87.3,7.2 77.6,7.2 77.4,7.4 75.2,9.6
GND5
  pour Top: 75.2,42.8 89.8,42.8 89.8,28.6 87.4,26.2 87.3,26.2 77.6,26.2 77.4,26.4 75.2,28.6
GND6
  pour Top: 58.2,42.8 72.8,42.8 72.8,28.6 70.4,26.2 70.3,26.2 60.6,26.2 60.4,26.4 58.2,28.6
GND7
  pour Top: 41.2,42.8 55.8,42.8 55.8,28.6 53.4,26.2 53.3,26.2 43.6,26.2 43.4,26.4 41.2,28.6
GND8
  pour Top: 24.2,42.8 38.8,42.8 38.8,28.6 36.4,26.2 36.3,26.2 26.6,26.2 26.4,26.4 24.2,28.6
GND9
  pour Top: 7.2,42.8 21.8,42.8 21.8,28.6 19.4,26.2 19.3,26.2 9.6,26.2 9.4,26.4 7.2,28.6
GND10
  pour Top: 7.2,61.8 21.8,61.8 21.8,47.6 19.4,45.2 19.3,45.2 9.6,45.2 9.4,45.4 7.2,47.6
GND11
  pour Top: 24.2,61.8 38.8,61.8 38.8,47.6 36.4,45.2 36.3,45.2 26.6,45.2 26.4,45.4 24.2,47.6
GND12
  pour Top: 41.2,61.8 55.8,61.8 55.8,47.6 53.4,45.2 53.3,45.2 43.6,45.2 43.4,45.4 41.2,47.6
GND13
  pour Top: 58.2,61.8 72.8,61.8 72.8,47.6 70.4,45.2 70.3,45.2 60.6,45.2 60.4,45.4 58.2,47.6
GND14
  pour Top: 75.2,61.8 89.8,61.8 89.8,47.6 87.4,45.2 87.3,45.2 77.6,45.2 77.4,45.4 75.2,47.6
GND15
  pour Top: 75.2,80.8 89.8,80.8 89.8,66.6 87.4,64.2 87.3,64.2 77.6,64.2 77.4,64.4 75.2,66.6
GND16
  pour Top: 58.2,80.8 72.8,80.8 72.8,66.6 70.4,64.2 70.3,64.2 60.6,64.2 60.4,64.4 58.2,66.6
GND17
  pour Top: 41.2,80.8 55.8,80.8 55.8,66.6 53.4,64.2 53.3,64.2 43.6,64.2 43.4,64.4 41.2,66.6
GND18
  pour Top: 24.2,80.8 38.8,80.8 38.8,66.6 36.4,64.2 36.3,64.2 26.6,64.2 26.4,64.4 24.2,66.6
GND19
  pour Top: 7.2,80.8 21.8,80.8 21.8,66.6 19.4,64.2 19.3,64.2 9.6,64.2 9.4,64.4 7.2,66.6
OUT
  pour Top: 0.5,87.5 0.5,0.5 96.5,0.5 96.5,4.5 91,4.5 4.5,4.5 4.5,87.5
  pour Top: 96.5,4.5 96.5,87.5 4.5,87.5 4.5,83.5 92.5,83.5 92.5,4.5
  pour Bottom: 0.5,87.5 0.5,0.5 96.5,0.5 96.5,4.5 91,4.5 4.5,4.5 4.5,87.5
  pour Bottom: 96.5,4.5 96.5,87.5 4.5,87.5 4.5,83.5 92.5,83.5 92.5,4.5
SEL1
  Top 0.203: IC1.3 12.39,8.26 12.28,8.37 12.28,17.16 R2.2
  Top 0.406: R2.2 R1.1
SEL2
  Top 0.203: R4.2 11.32,18.32 11.32,16.31 11.8,15.83 11.8,7.89 12.09,7.61 IC1.4
  Top 0.406: R3.1 R4.2
SEL3
  Top 0.203: IC2.3 29.39,8.26 29.28,8.37 29.28,17.16 R6.2
  Top 0.406: R6.2 R5.1
SEL4
  Top 0.203: R7.2 28.32,18.32 28.32,16.31 28.8,15.83 28.8,7.89 29.09,7.61 IC2.4
  Top 0.406: R8.1 R7.2
SEL5
  Top 0.203: IC3.3 46.39,8.26 46.28,8.37 46.28,17.16 R10.2
  Top 0.406: R10.2 R9.1
SEL6
  Top 0.203: R11.2 45.33,18.32 45.33,16.31 45.8,15.83 45.8,7.89 46.09,7.61 IC3.4
  Top 0.406: R12.1 R11.2
SEL7
  Top 0.203: IC4.3 63.39,8.26 63.28,8.37 63.28,17.16 R14.2
  Top 0.406: R14.2 R13.1
SEL8
  Top 0.203: R15.2 62.33,18.32 62.33,16.31 62.8,15.83 62.8,7.89 63.09,7.61 IC4.4
  Top 0.406: R16.1 R15.2
SEL9
  Top 0.203: IC5.3 80.39,8.26 80.28,8.37 80.28,17.16 R18.2
  Top 0.406: R18.2 R17.1
SEL10
  Top 0.203: R19.2 79.33,18.32 79.33,16.31 79.8,15.83 79.8,7.89 80.09,7.61 IC5.4
  Top 0.406: R20.1 R19.2
SEL11
  Top 0.203: IC6.3 80.39,27.26 80.28,27.37 80.28,36.16 R22.2
  Top 0.406: R22.2 R21.1
SEL12
  Top 0.203: R23.2 79.33,37.31 79.33,35.31 79.8,34.83 79.8,26.89 80.09,26.61 IC6.4
  Top 0.406: R24.1 R23.2
SEL13
  Top 0.203: IC7.3 63.39,27.26 63.28,27.37 63.28,36.16 R26.2
  Top 0.406: R26.2 R25.1
SEL14
  Top 0.203: R27.2 62.33,37.31 62.33,35.31 62.8,34.83 62.8,26.89 63.09,26.61 IC7.4
  Top 0.406: R28.1 R27.2
SEL15
  Top 0.203: IC8.3 46.39,27.26 46.28,27.37 46.28,36.16 R30.2
  Top 0.406: R30.2 R29.1
SEL16
  Top 0.203: R31.2 45.33,37.31 45.33,35.31 45.8,34.83 45.8,26.89 46.09,26.61 IC8.4
  Top 0.406: R32.1 R31.2
SEL17
  Top 0.203: IC9.3 29.39,27.26 29.28,27.37 29.28,36.16 R34.2
  Top 0.406: R34.2 R33.1
SEL18
  Top 0.203: R35.2 28.32,37.31 28.32,35.31 28.8,34.83 28.8,26.89 29.09,26.61 IC9.4
  Top 0.406: R36.1 R35.2
SEL19
  Top 0.203: IC10.3 12.39,27.26 12.28,27.37 12.28,36.16 R38.2
  Top 0.406: R38.2 R37.1
SEL20
  Top 0.203: R39.2 11.32,37.31 11.32,35.31 11.8,34.83 11.8,26.89 12.09,26.61 IC10.4
  Top 0.406: R40.1 R39.2
SEL21
  Top 0.203: IC11.3 12.39,46.26 12.28,46.37 12.28,55.16 R42.2
  Top 0.406: R42.2 R41.1
SEL22
  Top 0.203: R43.2 11.32,56.31 11.32,54.31 11.8,53.83 11.8,45.89 12.09,45.61 IC11.4
  Top 0.406: R44.1 R43.2
SEL23
  Top 0.203: IC12.3 29.39,46.26 29.28,46.37 29.28,55.16 R46.2
  Top 0.406: R46.2 R45.1
SEL24
  Top 0.203: R47.2 28.32,56.31 28.32,54.31 28.8,53.83 28.8,45.89 29.09,45.61 IC12.4
  Top 0.406: R48.1 R47.2
SEL25
  Top 0.203: IC13.3 46.39,46.26 46.28,46.37 46.28,55.16 R50.2
  Top 0.406: R50.2 R49.1
SEL26
  Top 0.203: R51.2 45.33,56.31 45.33,54.31 45.8,53.83 45.8,45.89 46.09,45.61 IC13.4
  Top 0.406: R52.1 R51.2
SEL27
  Top 0.203: IC14.3 63.39,46.26 63.28,46.37 63.28,55.16 R54.2
  Top 0.406: R54.2 R53.1
SEL28
  Top 0.203: R55.2 62.33,56.31 62.33,54.31 62.8,53.83 62.8,45.89 63.09,45.61 IC14.4
  Top 0.406: R56.1 R55.2
SEL29
  Top 0.203: IC15.3 80.39,46.26 80.28,46.37 80.28,55.16 R58.2
  Top 0.406: R58.2 R57.1
SEL30
  Top 0.203: R59.2 79.33,56.31 79.33,54.31 79.8,53.83 79.8,45.89 80.09,45.61 IC15.4
  Top 0.406: R60.1 R59.2
SEL31
  Top 0.203: IC16.3 80.39,65.26 80.28,65.37 80.28,74.16 R62.2
  Top 0.406: R62.2 R61.1
SEL32
  Top 0.203: R63.2 79.33,75.31 79.33,73.31 79.8,72.83 79.8,64.89 80.09,64.61 IC16.4
  Top 0.406: R64.1 R63.2
SEL33
  Top 0.203: IC17.3 63.39,65.26 63.28,65.37 63.28,74.16 R66.2
  Top 0.406: R66.2 R65.1
SEL34
  Top 0.203: R67.2 62.33,75.31 62.33,73.31 62.8,72.83 62.8,64.89 63.09,64.61 IC17.4
  Top 0.406: R68.1 R67.2
SEL35
  Top 0.203: IC18.3 46.39,65.26 46.28,65.37 46.28,74.16 R70.2
  Top 0.406: R70.2 R69.1
SEL36
  Top 0.203: R71.2 45.33,75.31 45.33,73.31 45.8,72.83 45.8,64.89 46.09,64.61 IC18.4
  Top 0.406: R72.1 R71.2
SEL37
  Top 0.203: IC19.3 29.39,65.26 29.28,65.37 29.28,74.16 R74.2
  Top 0.406: R74.2 R73.1
SEL38
  Top 0.203: R75.2 28.32,75.31 28.32,73.31 28.8,72.83 28.8,64.89 29.09,64.61 IC19.4
  Top 0.406: R76.1 R75.2
SEL39
  Top 0.203: IC20.3 12.39,65.26 12.28,65.37 12.28,74.16 R78.2
  Top 0.406: R78.2 R77.1
SEL40
  Top 0.203: R79.2 11.32,75.31 11.32,73.31 11.8,72.83 11.8,64.89 12.09,64.61 IC20.4
  Top 0.406: R80.1 R79.2

## Text on the board
bPlace: R1 R2 R3 R4 X / - 0 0 - 1 / 0 - - 0 2 / 0 - 0 - 4 / - 0 - - 8 / 0 - - - 16 | R1 R2 R3 R4 X / - 0 0 - 1 / 0 - - 0 2 / 0 - 0 - 4 / - 0 - - 8 / 0 - - - 16 | R1 R2 R3 R4 X / - 0 0 - 1 / 0 - - 0 2 / 0 - 0 - 4 / - 0 - - 8 / 0 - - - 16 | R1 R2 R3 R4 X / - 0 0 - 1 / 0 - - 0 2 / 0 - 0 - 4 / - 0 - - 8 / 0 - - - 16 | R1 R2 R3 R4 X / - 0 0 - 1 / 0 - - 0 2 / 0 - 0 - 4 / - 0 - - 8 / 0 - - - 16 | R1 R2 R3 R4 X / - 0 0 - 1 / 0 - - 0 2 / 0 - 0 - 4 / - 0 - - 8 / 0 - - - 16 | R1 R2 R3 R4 X / - 0 0 - 1 / 0 - - 0 2 / 0 - 0 - 4 / - 0 - - 8 / 0 - - - 16 | R1 R2 R3 R4 X / - 0 0 - 1 / 0 - - 0 2 / 0 - 0 - 4 / - 0 - - 8 / 0 - - - 16 | R1 R2 R3 R4 X / - 0 0 - 1 / 0 - - 0 2 / 0 - 0 - 4 / - 0 - - 8 / 0 - - - 16 | R1 R2 R3 R4 X / - 0 0 - 1 / 0 - - 0 2 / 0 - 0 - 4 / - 0 - - 8 / 0 - - - 16 | R1 R2 R3 R4 X / - 0 0 - 1 / 0 - - 0 2 / 0 - 0 - 4 / - 0 - - 8 / 0 - - - 16 | R1 R2 R3 R4 X / - 0 0 - 1 / 0 - - 0 2 / 0 - 0 - 4 / - 0 - - 8 / 0 - - - 16 | R1 R2 R3 R4 X / - 0 0 - 1 / 0 - - 0 2 / 0 - 0 - 4 / - 0 - - 8 / 0 - - - 16 | R1 R2 R3 R4 X / - 0 0 - 1 / 0 - - 0 2 / 0 - 0 - 4 / - 0 - - 8 / 0 - - - 16 | R1 R2 R3 R4 X / - 0 0 - 1 / 0 - - 0 2 / 0 - 0 - 4 / - 0 - - 8 / 0 - - - 16 | R1 R2 R3 R4 X / - 0 0 - 1 / 0 - - 0 2 / 0 - 0 - 4 / - 0 - - 8 / 0 - - - 16 | R1 R2 R3 R4 X / - 0 0 - 1 / 0 - - 0 2 / 0 - 0 - 4 / - 0 - - 8 / 0 - - - 16 | R1 R2 R3 R4 X / - 0 0 - 1 / 0 - - 0 2 / 0 - 0 - 4 / - 0 - - 8 / 0 - - - 16 | R1 R2 R3 R4 X / - 0 0 - 1 / 0 - - 0 2 / 0 - 0 - 4 / - 0 - - 8 / 0 - - - 16 | R1 R2 R3 R4 X / - 0 0 - 1 / 0 - - 0 2 / 0 - 0 - 4 / - 0 - - 8 / 0 - - - 16
tNames: - | + | - | + | - | + | - | + | - | + | R4 | A | B | R4 | A | B | R4 | A | B | R4 | A | B | R4 | A | B | R3 | R3 | R3 | R3 | R3 | R2 | R1 | R2 | R1 | R2 | R1 | R2 | R1 | R2 | R1 | iC-PX v1 | iC-PX v1 | iC-PX v1 | iC-PX v1 | iC-PX v1 | C1 | C1 | C1 | C1 | C1 | IC1 | IC1 | IC1 | IC1 | IC1 | - | + | - | + | - | + | - | + | - | + | A | B | A | B | A | B | A | B | A | B | R4 | R3 | R4 | R3 | R4 | R3 | R4 | R3 | R4 | R3 | R2 | R1 | R2 | R1 | R2 | R1 | R2 | R1 | R2 | R1 | iC-PX v1 | iC-PX v1 | iC-PX v1 | iC-PX v1 | iC-PX v1 | C1 | C1 | C1 | C1 | C1 | IC1 | IC1 | IC1 | IC1 | IC1 | - | + | - | + | - | + | - | + | - | + | R4 | A | B | R4 | A | B | R4 | A | B | R4 | A | B | R4 | A | B | R3 | R3 | R3 | R3 | R3 | R2 | R1 | R2 | R1 | R2 | R1 | R2 | R1 | R2 | R1 | iC-PX v1 | iC-PX v1 | iC-PX v1 | iC-PX v1 | iC-PX v1 | C1 | C1 | C1 | C1 | C1 | IC1 | IC1 | IC1 | IC1 | IC1 | - | + | - | + | - | + | - | + | - | + | A | B | A | B | A | B | A | B | A | B | R4 | R3 | R4 | R3 | R4 | R3 | R4 | R3 | R4 | R3 | R2 | R1 | R2 | R1 | R2 | R1 | R2 | R1 | R2 | R1 | iC-PX v1 | iC-PX v1 | iC-PX v1 | iC-PX v1 | iC-PX v1 | C1 | C1 | C1 | C1 | C1 | IC1 | IC1 | IC1 | IC1 | IC1